# Altium PCB DMG_Control_PanelV2.PcbDoc (part 1 of 2)
Units mm, origin at the board's own origin, x right, y up, seen from the top; angles counter-clockwise.
Board outline 81.28 x 71.72 mm, 2 copper layers (Top, Bottom), stack 1.572 mm thick; 117 components, 107 nets, 413 pads, 81 vias.
Unrouted connection lines stored in the file: 2.
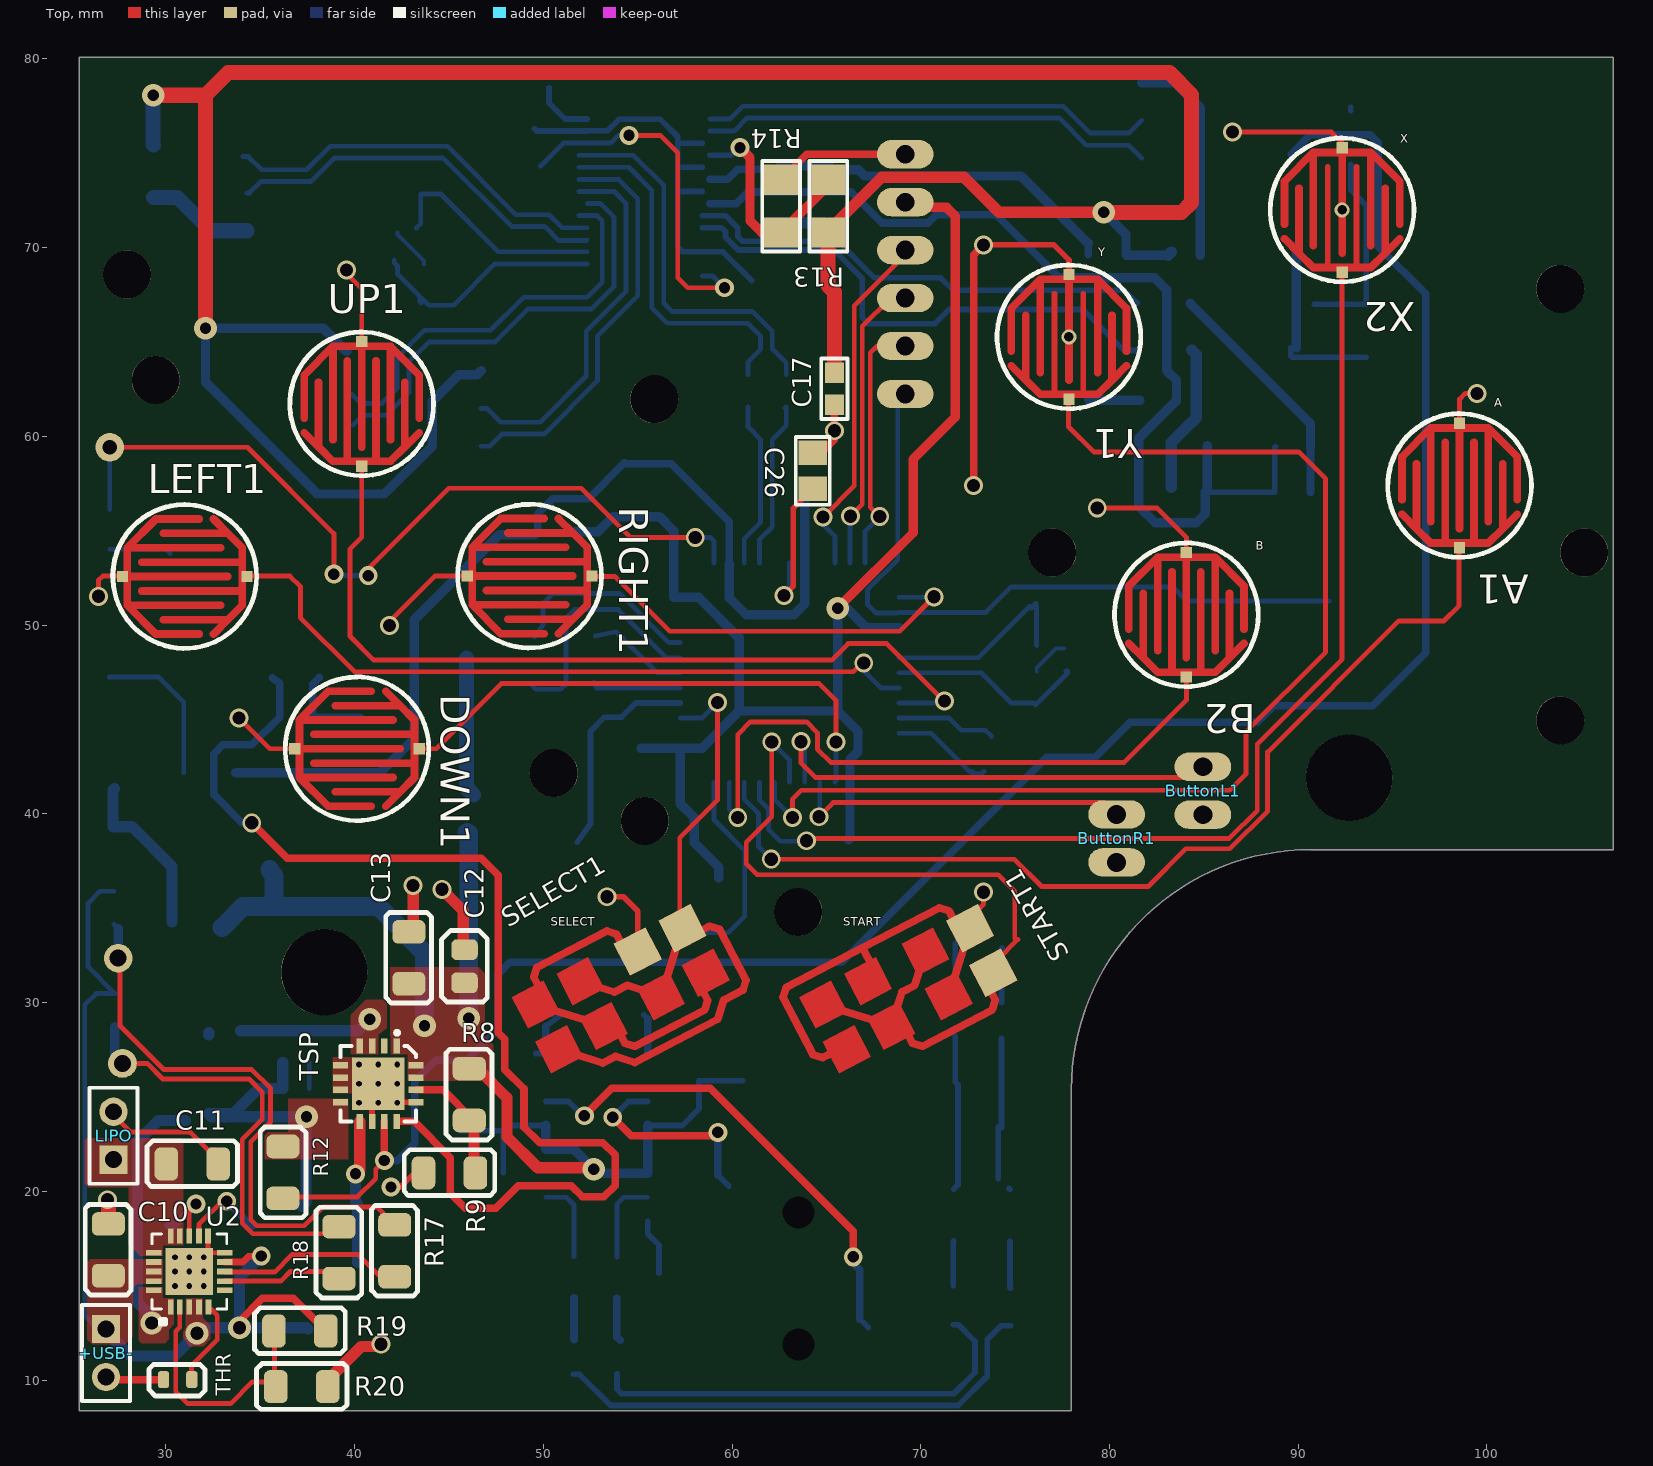
[diagram p0: Top view]
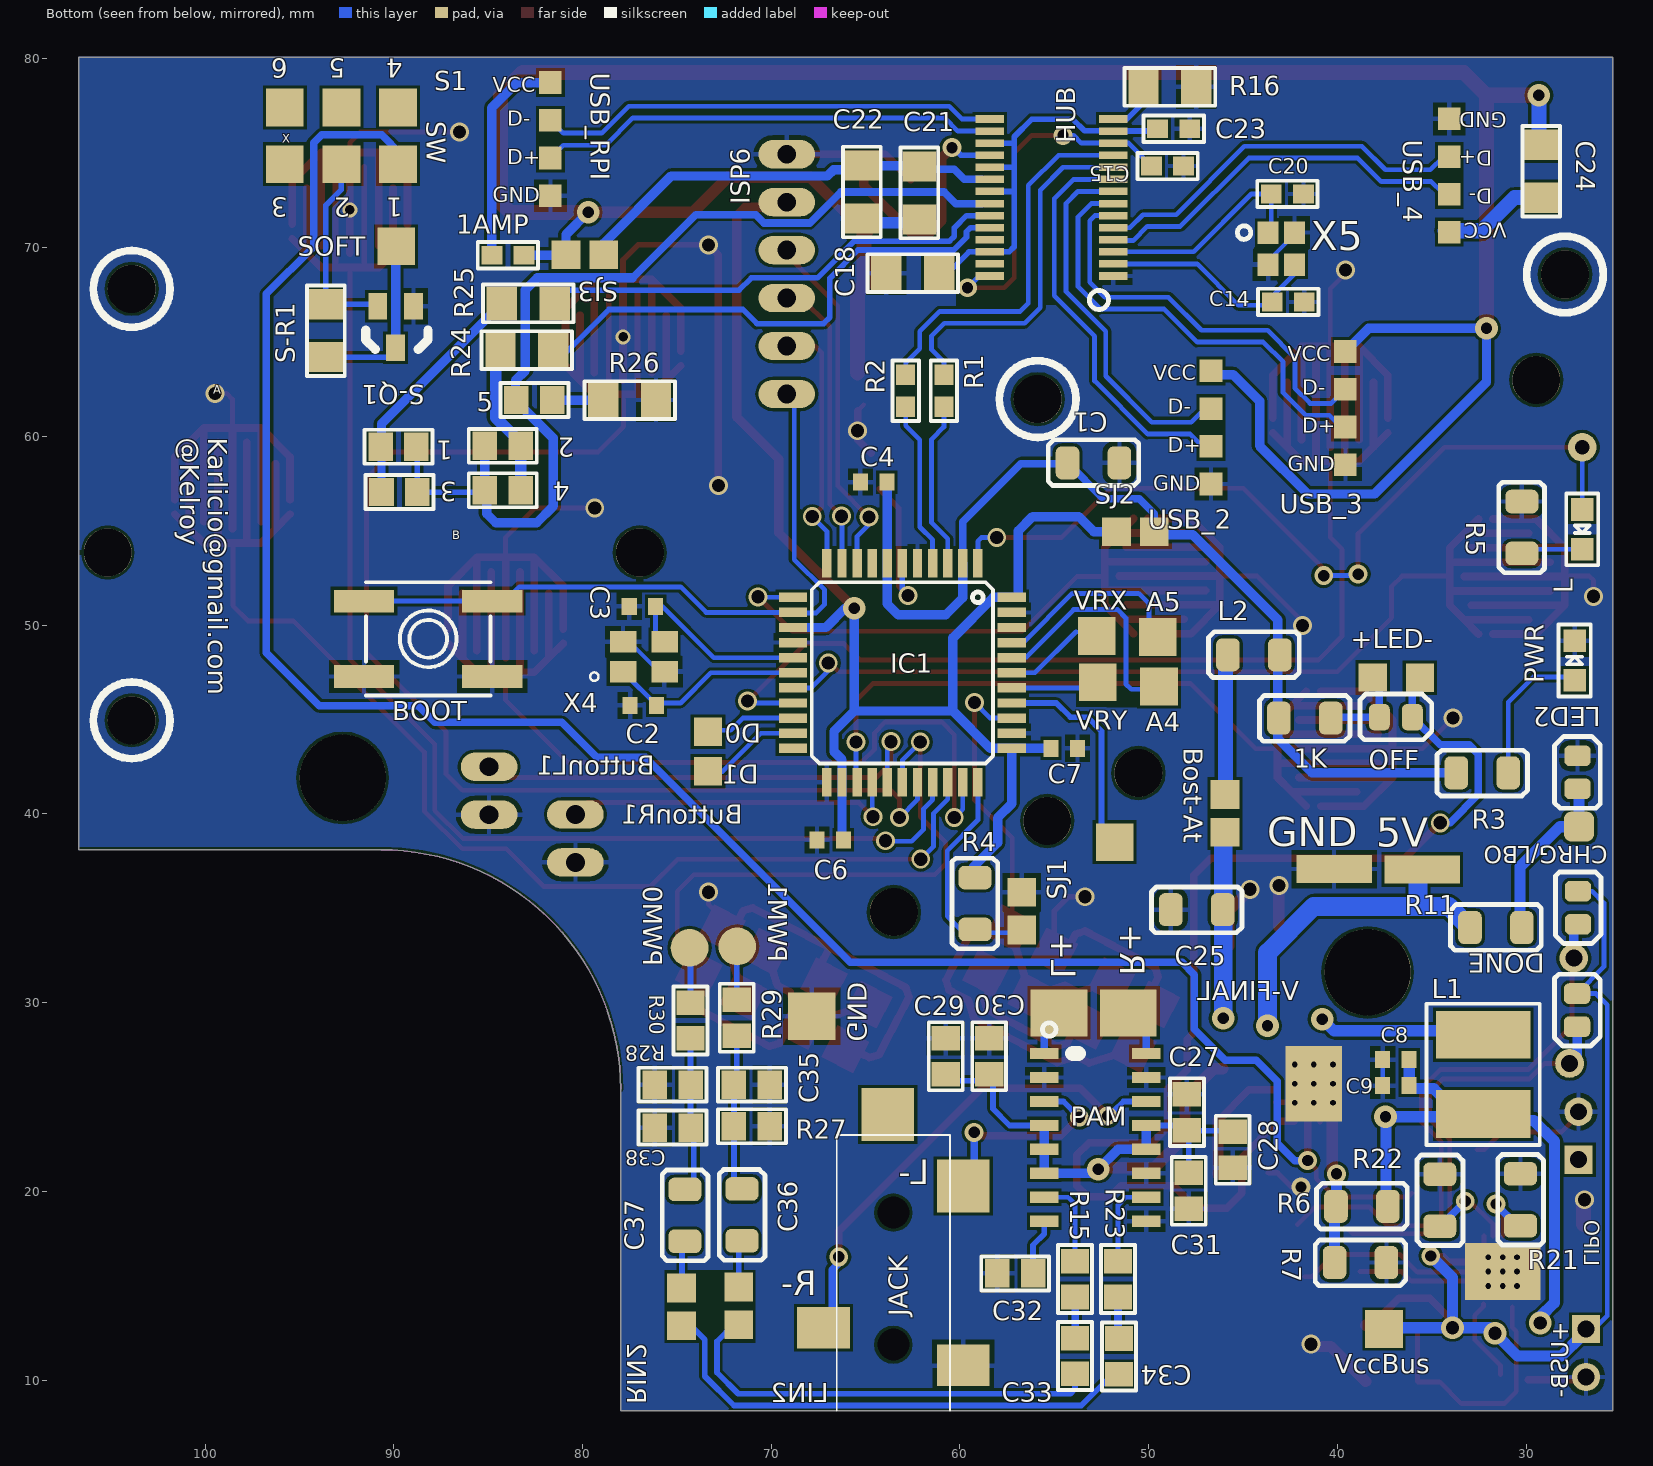
[diagram p1: Bottom view, seen from below]

## Layer stack, top to bottom
Top Solder: solder mask 0.0102, Solder Resist, Dk 3.5
Top: signal copper 0.0356
Dielectric 1: core 1.5011, FR-4, Dk 4.8
Bottom: signal copper 0.0356
Bottom Solder: solder mask 0.0102, Solder Resist, Dk 3.5

## Board outline
25.4,8.382 25.4,80.1 106.68,80.1 106.68,38.1 90.678,38.1 ccw(c90.678,25.4) 77.978,25.4 77.978,8.382

## Design rules (kind name [scope] priority, off if disabled: settings)
Clearance [All] p1: gap=0.152 except(0: SMDPad-SMDPad SMDPad-THPad SMDPad-Via)
Clearance "Clearance (Same Net)" [All] p2: gap=0 except(0.152: SMDPad-SMDPad SMDPad-THPad SMDPad-Via)
DiffPairsRouting DiffPair_FE1sDiffPairsRouting [InDifferentialPairClass('DIFF90')] p1: maxlimit=0.35 minlimit=0.254 mostfreqgap=0.3 toplayer_minwidth=0.2 toplayer_maxwidth=0.381 toplayer_prefwidth=0.254 bottomlayer_minwidth=0.2 bottomlayer_maxwidth=0.381 bottomlayer_prefwidth=0.254 maxuncoupledlength=12.7
DiffPairsRouting ATMEGADIFFDiffPairsRouting [InDifferentialPairClass('ATDIFF90')] p2: maxlimit=0.35 minlimit=0.254 mostfreqgap=0.3 toplayer_minwidth=0.2 toplayer_maxwidth=0.3 toplayer_prefwidth=0.254 bottomlayer_minwidth=0.2 bottomlayer_maxwidth=0.3 bottomlayer_prefwidth=0.254 maxuncoupledlength=12.7
DiffPairsRouting [All] p3: maxlimit=0.254 minlimit=0.254 mostfreqgap=0.254 toplayer_minwidth=0.381 toplayer_maxwidth=0.381 toplayer_prefwidth=0.381 bottomlayer_minwidth=0.381 bottomlayer_maxwidth=0.381 bottomlayer_prefwidth=0.381 maxuncoupledlength=12.7
HoleSize HoleSize_1 [All] p1: absolutevalues=TRUE maxlimit=2540 minlimit=0.33 maxpercent=80.000 minpercent=20.000
HoleSize [All] p2: absolutevalues=TRUE maxlimit=2.54 minlimit=0.025 maxpercent=80.000 minpercent=20.000
HoleToHoleClearance mdViaViaSameLayer [All] p1: gap=0.203 allowstackedmicrovias=TRUE
HoleToHoleClearance [All] p2: gap=0.254 allowstackedmicrovias=TRUE
MatchedLengths DiffPair_FE1sMatchedLengths [InDifferentialPairClass('DIFF90')] p1: tolerance=0.127 checknetsindiffpair=FALSE checkdiffpairvsdiffpair=TRUE checkxsignals=TRUE checkothers=TRUE
MatchedLengths ATMEGADIFFMatchedLengths [InDifferentialPairClass('ATDIFF90')] p2: tolerance=0.127 checknetsindiffpair=FALSE checkdiffpairvsdiffpair=TRUE checkxsignals=TRUE checkothers=TRUE
PasteMaskExpansion mlMinCreamFrame [All] p1: expansion=0
PasteMaskExpansion [All] p2: expansion=0
PlaneConnect PlaneConnect_1 [All] p1: planeconnectstyle=Relief reliefexpansion=0.508 reliefentries=4 reliefconductorwidth=0.254 reliefairgap=0.254
PolygonConnect PolygonConnect_10 [All vs IsNamedPolygon('5vAMP')] p1: connectstyle=Direct reliefconductorwidth=0.254 reliefentries=4 polygonreliefangle="90 Angle" airgapwidth=0.254
PolygonConnect PolygonConnect_9 [All vs IsNamedPolygon('GND PLANE')] p2: connectstyle=Relief reliefconductorwidth=0.254 reliefentries=4 polygonreliefangle="90 Angle" airgapwidth=0.254
PolygonConnect PolygonConnect_8 [All vs IsNamedPolygon('GND PLANE')] p3: connectstyle=Relief reliefconductorwidth=0.3 reliefentries=4 polygonreliefangle="90 Angle" airgapwidth=0.254
PolygonConnect PolygonConnect_7 [All vs IsNamedPolygon('GND PLANE')] p4: connectstyle=Relief reliefconductorwidth=0.35 reliefentries=4 polygonreliefangle="90 Angle" airgapwidth=0.254
PolygonConnect PolygonConnect_6 [All vs IsNamedPolygon('GNDTSP')] p5: connectstyle=Direct reliefconductorwidth=0.254 reliefentries=4 polygonreliefangle="90 Angle" airgapwidth=0.254
PolygonConnect PolygonConnect_5 [All vs IsNamedPolygon('VBAT TSP')] p6: connectstyle=Direct reliefconductorwidth=0.254 reliefentries=4 polygonreliefangle="90 Angle" airgapwidth=0.254
PolygonConnect PolygonConnect_4 [All vs IsNamedPolygon('AMP')] p7: connectstyle=Direct reliefconductorwidth=0.254 reliefentries=4 polygonreliefangle="90 Angle" airgapwidth=0.254
PolygonConnect PolygonConnect_3 [All vs IsNamedPolygon('MCP-VBus')] p8: connectstyle=Direct reliefconductorwidth=0.254 reliefentries=4 polygonreliefangle="90 Angle" airgapwidth=0.254
PolygonConnect PolygonConnect_2 [All vs IsNamedPolygon('MCP')] p9: connectstyle=Direct reliefconductorwidth=0.254 reliefentries=4 polygonreliefangle="90 Angle" airgapwidth=0.254
PolygonConnect PolygonConnect_1 [All vs IsNamedPolygon('TSP')] p10: connectstyle=Direct reliefconductorwidth=0.254 reliefentries=4 polygonreliefangle="90 Angle" airgapwidth=0.254
PolygonConnect ThermalVias [IsVia] p11: connectstyle=Direct reliefconductorwidth=0.254 reliefentries=4 polygonreliefangle="90 Angle" airgapwidth=0.254
PolygonConnect [All] p12: connectstyle=Relief reliefconductorwidth=0.254 reliefentries=4 polygonreliefangle="90 Angle" airgapwidth=0.254
RoutingVias [All] p1: holewidth=0.7 width=1 viastyle="Through Hole" minholewidth=0.6 minwidth=1 maxholewidth=0.8 maxwidth=1.27
SilkToSilkClearance [All] p1 off: silktosilkclearance=0.254
SilkToSolderMaskClearance [IsPad] p1 off: minsilkscreentomaskgap=0.254 clearancetoexposedcopper=TRUE
SolderMaskExpansion mlMinStopFrame [All] p1: expansion=0.102
SolderMaskExpansion [All] p2: expansion=0.102
Width Width_1 [All] p1: maxlimit=2540 minlimit=0.152 preferedwidth=0.254
Width [All] p2: maxlimit=0.254 minlimit=0.254 preferedwidth=0.254
23 further rules are at their usual default settings.

## Classes and differential pairs
differential pair class ATDIFF90: AT USB1
differential pair class DIFF90: OUTUSB USB2 USB3 USB4
net class DIFF90: AT_N AT_P OUTUSB_N OUTUSB_P USB1_N USB1_P USB2_N USB2_P USB3_N USB3_P USB4_N USB4_P
component class Audio_Actual: C27 C28 C29 C30 C31 C32 C33 C34 C35 C36 C37 C38 PAM R15 R23 R27 R28 R29 R30
component class Sheet2: 1 1AMP 2 3 4 5 C14 C15 C17 C18 C20 C21 C22 C23 C24 HUB R13 R14 R16 R24 R25 R26 S1 S-Q1 S-R1 SJ3 USB_2 USB_3 USB_4 USB_RPI X5
component class Sheet1: A1 B2 BOOT Bost-At ButtonL1 ButtonR1 C1 C2 C3 C4 C6 C7 C26 DOWN1 IC1 ISP6 L2 LEFT1 PWR R1 R2 R3 R4 R5 RIGHT1 SELECT1 SJ1 SJ2 START1 UP1 X2 X4 Y1
component class PowerBoost_kel: +USB- BateryIn C8 C9 C10 C11 C12 C13 C25 CHRG/LBO DONE L1 l-LOW LED2 LIPO OFF R6 R7 R8 R9 R11 R12 R17 R18 R19 R20 R21 R22 T1 THERM THR TSP U2 VBatIn X1
differential pair USB4: +USB4_P -USB4_N
differential pair USB3: +USB3_P -USB3_N
differential pair USB2: +USB2_P -USB2_N
differential pair USB1: +USB1_P -USB1_N
differential pair OUTUSB: +OUTUSB_P -OUTUSB_N
differential pair AT: +AT_P -AT_N

## Components (designator, comment, footprint, x,y, rotation, side; value= is the part's Value field where it differs from the comment)
1 "GREEN" 0805 89.75,59.45 r0 bottom
1AMP "Fuse 2" 0603 83.95,69.6 r180 bottom
1K "Comment" RES-1206in 40.35,45.075 r0 bottom
2 "GREEN" 0805 84.225,59.5 r180 bottom
3 "GREEN" 0805 89.7,57.05 r180 bottom
4 "GREEN" 0805 84.225,57.15 r0 bottom
5 "RED" 0805 82.55,61.925 r180 bottom
+USB- "Header 2" HDR1X2 26.825,12.7 r270 top (schematic designator VBatIn)
A1 "SW-PB" DMG-BTN 98.55,57.4 r180 top
B2 "SW-PB" DMG-BTN 84.075,50.55 r180 top
BOOT "EVQQ2" EVQ-Q2 88.175,49.275 r0 bottom
Bost-At "HWB" JUMPER 45.95,39.025 r90 bottom (schematic designator SJ3)
ButtonL1 "SW-PB" 1X02_OVAL 84.95,41.225 r90 top
ButtonR1 "SW-PB" 1X02_OVAL 80.375,38.7 r90 top
C1 "Cap Pol1" RES-1206in 54.3,58.6 r180 bottom
C2 "9pF" 1608[0603] 76.775,45.75 r180 bottom
C3 "9pF" 1608[0603] 76.825,51 r180 bottom
C4 "0.1uF" 1608[0603] 64.575,57.575 r0 bottom
C6 "0.1uF" 1608[0603] 66.875,38.625 r0 bottom
C7 "0.1uF" 1608[0603] 54.475,43.475 r180 bottom
C8 "10uF" 1608[0603] 36.9,26.975 r0 bottom
C9 "0.1uF" 1608[0603] 36.9,25.6 r0 bottom
C10 "10uF" RES-1206in 26.95,15.525 r90 top
C11 "10uF" RES-1206in 30.025,21.45 r0 top
C12 "2.2uF" RES-0805 45.825,31.05 r90 top
C13 "100uF" RES-1206in 42.875,31 r90 top
C14 "Cap" 0603 42.6,67.125 r180 bottom
C15 "Cap" 0603 49,74.325 r180 bottom
C17 "Cap" 0603 65.425,62.525 r90 top
C18 "Cap" 1206 62.5,68.65 r0 bottom
C20 "Cap" 0603 42.65,72.85 r0 bottom
C21 "Cap" 1206 62.15,72.9 r90 bottom
C22 "Cap" 1206 65.2,72.95 r90 bottom
C23 "Cap" 0603 48.675,76.3 r0 bottom
C24 "Cap" 1206 29.2,74.05 r90 bottom
C25 "Cap2" RES-1206in 46.075,34.925 r0 bottom
C26 "Cap" 0805 64.275,58.175 r270 top
C27 "Cap" 0805 47.975,24.192 r90 bottom
C28 "Cap" 0805 45.548,22.204 r90 bottom
C29 "Cap" 0805 60.752,27.154 r90 bottom
C30 "Cap" 0805 58.452,27.154 r270 bottom
C31 "Cap" 0805 47.875,20.025 r90 bottom
C32 "Cap" 0805 57.075,15.65 r0 bottom
C33 "Cap" 0805 53.9,11.275 r90 bottom
C34 "Cap" 0805 51.575,11.25 r90 bottom
C35 "Cap" 0805 71.025,25.65 r180 bottom
C36 "Cap" RES-1206in 71.55,20.125 r270 bottom
C37 "Cap" RES-1206in 74.575,20.1 r270 bottom
C38 "Cap" 0805 75.225,23.375 r180 bottom
CHRG/LBO "ORANGE" RES-0805 27.25,35.9 r270 bottom
DONE "GREEN" RES-0805 27.3,30.475 r270 bottom
DOWN1 "SW-PB" DMG-BTN 40.125,43.45 r270 top
HUB "Fe1.1s" fe1.1s 51.875,68.5 r90 bottom
IC1 "ATMEGA32U4-AU" TQFP44 63.05,47.475 r270 bottom
ISP6 "PINHD-2X3THM" 1X06_OVAL 69.175,68.6 r270 bottom
JACK "Comment" jack3.5 61.225,8.375 r90 bottom
L "RED" CHIPLED_0805 27.025,55.075 r0 bottom
L1 "6.8uH" INDUCTOR_5X5MM_TDK_VLC5045 32.275,26.2 r90 bottom
L2 "500mA" RES-1206in 45.8,48.425 r180 bottom
LED2 "BLUE" RES-0805 27.275,41.325 r90 bottom
LEFT1 "SW-PB" DMG-BTN 31,52.575 r270 top
LIPO "Header 2" HDR1X2 27.225,21.675 r90 top (schematic designator BateryIn)
OFF "RED" RES-0805 37.775,45.125 r180 bottom (schematic designator LED1)
PAM "Pam8403" "pam8403 Sop16" 55.525,27.3 r270 bottom
PWR "GREEN" CHIPLED_0805 27.425,48.125 r180 bottom
R1 "22" 0603 60.85,62.42 r270 bottom
R2 "22" 0603 62.875,62.42 r270 bottom
R3 "1K" RES-1206in 30.95,42.175 r0 bottom
R4 "10K" RES-1206in 59.2,33.875 r90 bottom
R5 "1K" RES-1206in 30.225,53.8 r90 bottom
R6 "1.87M" RES-1206in 40.075,19.2 r180 bottom
R7 "340K" RES-1206in 37.4,16.225 r0 bottom
R8 "1.87M" RES-1206in 46.075,23.75 r90 top
R9 "200K" RES-1206in 43.65,20.975 r0 top
R11 "1K" RES-1206in 32.975,33.975 r180 bottom
R12 "200K" RES-1206in 36.2,22.375 r270 top
R13 "Res1" 1206 65.1,72.2 r270 top
R14 "Res1" 1206 62.6,72.2 r270 top
R15 "Res2" 0805 53.9,15.35 r90 bottom
R16 "Res1" 1206 48.875,78.525 r0 bottom
R17 "1K" RES-1206in 42.125,15.475 r90 top
R18 "1K" RES-1206in 39.175,15.375 r90 top
R19 "270K" RES-1206in 35.725,12.6 r0 top
R20 "100K" RES-1206in 35.825,9.65 r0 top
R21 "1.0K" RES-1206in 30.3,20.925 r270 bottom
R22 "100K" RES-1206in 34.575,20.9 r270 bottom
R23 "Res2" 0805 51.625,15.35 r90 bottom
R24 "Res1" 1206 82.95,64.575 r0 bottom
R25 "Res1" 1206 82.875,67.05 r0 bottom
R26 "Res1" 1206 77.5,61.925 r0 bottom
R27 "Res2" 0805 71.025,23.45 r180 bottom
R28 "Res2" 0805 75.225,25.65 r180 bottom
R29 "Res2" 0805 71.827,29.198 r270 bottom
R30 "Res2" 0805 74.275,29.05 r270 bottom
RIGHT1 "SW-PB" DMG-BTN 49.275,52.6 r270 top
S1 "SW DPDT" Switch 89.775,74.425 r0 bottom
S-Q1 "JFET-P" "SOT-23 TO236" 88.95,66.9 r0 bottom
S-R1 "Res1" 1206 93.6,65.6 r270 bottom
SELECT1 "SW-PB" DMG-SEL 54.102,30.734 r27.5 top
SJ1 "HWB" JUMPER 56.725,33.85 r90 bottom
SJ2 "VCC" JUMPER 51.7,54.95 r180 bottom
SJ3 "HUB-HWB" JUMPER 78.875,69.625 r0 bottom
SJ3 "HWB" JUMPER 71.725,12.925 r90 bottom
SJ3 "HWB" JUMPER 74.75,12.875 r90 bottom
START1 "SW-PB" DMG-ST 69.342,30.734 r27.5 top
THR "15K" Res-0603 29.875,10.025 r0 top (schematic designator THERM)
TSP "TPS61090RSAR" QFN65P400X400X100-17N 41.25,25.7 r270 top (schematic designator U2)
U2 "MCP73871" QFN50P400X400X100-21N 31.242,15.748 r90 top
UP1 "SW-PB" DMG-BTN 40.375,61.725 r180 top
USB_2 "USB_4pin" USBPADS 46.7,63.475 r270 bottom
USB_3 "USB_4pin" USBPADS 39.575,64.5 r270 bottom
USB_4 "USB_4pin" USBPADS 34.075,70.825 r90 bottom
USB_RPI "USB_4pin" USBPADS 81.7,78.75 r270 bottom
X2 "SW-PB" "DMG-BTN -XY" 92.325,72 r180 top
X4 "SMD-CRYSTAL-16MHZ-9PF-Resonador" Resonador3.2x2.5 77.85,47.525 r180 bottom
X5 "SMD-CRYSTAL-16MHZ-9PF-Resonador" Res12MHZ-smd 43.675,70.8 r270 bottom
Y1 "SW-PB" "DMG-BTN -XY" 77.85,65.275 r180 top

## Footprints (in the part's own frame and the unit in brackets; to place one, negate y for a bottom-side part, rotate by r counter-clockwise, add the part's x,y. Pads: shape width x height; smd on the part's side, far side on the other; paste and mask are expansions set on the pad)
1X02_OVAL [mm]
  oval 1.5x3 hole 1: 1(-1.27,0) 2(1.27,0)
1X06_OVAL [mm]
  oval 1.5x3 hole 1: 1(-6.35,0) 2(-3.81,0) 3(-1.27,0) 4(1.27,0) 5(3.81,0) 6(6.35,0)
0603 [mm]
  rect 1.1x1 smd: 1(-0.85,0) 2(0.85,0)
  silkscreen extent -1.6,-0.7 1.6,0.7
0805 [mm]
  rect 1.3x1.5 smd: 1(-0.95,0) 2(0.95,0)
  silkscreen extent -1.8,-0.9 1.8,0.9
1206 [mm]
  rect 1.6x1.8 smd: 1(-1.4,0) 2(1.4,0)
  silkscreen extent -2.4,-1 2.4,1
1608[0603] [mm] "Chip Capacitor, Body 1.6x0.8mm, IPC High Density"
  rect 0.8x0.9 smd: 1(-0.7,0) 2(0.7,0)
  body extent -0.87,-0.48 0.87,0.48, height 1.3
CHIPLED_0805 [mm]
  rect 1.2x1.2 smd: A(0,-1.05) C(0,1.05)
  silkscreen extent -0.85,-1.9 0.85,1.9
DMG-BTN [mm]
  rect 0.6x0.6 smd: 1(0,-3.302) 2(0,3.302)
  Top lines w0.406: 3.048,1.524 2.286,2.286 ; 3.048,0.762 3.048,-1.524 1.524,-3.048 ; 2.286,-1.143 2.286,2.286 ; 1.524,1.905 1.524,-3.048 ; 0.762,-2.286 0.762,3.048 ; 0,2.286 0,-3.048 ; -0.762,-2.286 -0.762,3.048 ; -1.524,1.905 -1.524,-3.048 ; -2.286,-1.143 -2.286,2.286 ; -3.048,1.524 -2.286,2.286 ; -3.048,0.762 -3.048,-1.524 -1.524,-3.048 ; 2.286,2.286 1.524,3.048 0.762,3.048 ; 1.524,-3.048 0,-3.048 ; 0.762,3.048 -0.762,3.048 ; 0,-3.048 -1.524,-3.048 ; -0.762,3.048 -1.524,3.048 -2.286,2.286
  silkscreen extent -3.81,-3.81 3.81,3.81
"DMG-BTN -XY" [mm]
  rect 0.6x0.6 smd: 1(0,-3.302) 2(0,3.302)
  Top lines w0.3: 0.762,3.048 0.762,-2.286 ; -0.762,3.048 -0.762,-2.286
  Top lines w0.406: 3.048,1.524 2.286,2.286 ; 3.048,0.762 3.048,-1.524 1.524,-3.048 ; 2.286,-1.143 2.286,2.286 ; 1.524,1.905 1.524,-3.048 ; 0,2.286 0,-3.048 ; -1.524,1.905 -1.524,-3.048 ; -2.286,-1.143 -2.286,2.286 ; -3.048,1.524 -2.286,2.286 ; -3.048,0.762 -3.048,-1.524 -1.524,-3.048 ; 2.286,2.286 1.524,3.048 0.762,3.048 -0.762,3.048 -1.524,3.048 -2.286,2.286 ; 1.524,-3.048 0,-3.048 ; 0,-3.048 -1.524,-3.048
  Top (Mech8) keep-out circle w0: c0,0 r4.127
  silkscreen extent -3.81,-3.81 3.81,3.81
DMG-SEL [mil]
  rect 75x75 smd: 1(67.5,52.5) 2(172.5,52.5)
  Top region: 30,-90 105,-90 105,-15 30,-15
  Top region: 135,-90 210,-90 210,-15 135,-15
  Top region: 135,15 210,15 210,90 135,90
  Top region: 30,15 105,15 105,90 30,90
  Top region: -105,15 -30,15 -30,90 -105,90
  Top region: -105,-90 -30,-90 -30,-15 -105,-15
  Top region: -210,-90 -135,-90 -135,-15 -210,-15
  Top region: -210,15 -135,15 -135,90 -210,90
  Top lines w16: -150,75 -150,105 -135,120 30,120 45,105 45,75 ; -150,30 -90,-30 ; -150,-75 -105,-120 -75,-120 -45,-150 150,-150 180,-120 225,-120 240,-105 240,15 225,30 195,30 ; -45,30 -15,0 15,0 45,-30 ; -45,-75 -45,-105 -30,-120 135,-120 150,-105 150,-75 ; 90,-30 150,30
DMG-ST [mil]
  rect 75x75 smd: 1(172.5,52.5) 2(172.5,-52.5)
  Top region: -210,15 -135,15 -135,90 -210,90
  Top region: -210,-90 -135,-90 -135,-15 -210,-15
  Top region: -105,-90 -30,-90 -30,-15 -105,-15
  Top region: -105,15 -30,15 -30,90 -105,90
  Top region: 30,15 105,15 105,90 30,90
  Top region: 135,15 210,15 210,90 135,90
  Top region: 135,-90 210,-90 210,-15 135,-15
  Top region: 30,-90 105,-90 105,-15 30,-15
  Top lines w16: -210,-45 -225,-45 -240,-30 -240,105 -225,120 -45,120 ; -150,30 -90,-30 ; -45,75 -45,120 ; -45,-30 -15,0 15,0 45,30 ; -45,-75 -45,-105 -30,-120 135,-120 150,-105 150,-75 ; 90,-30 150,30 ; 150,75 150,105 135,120 -45,120
EVQ-Q2 [mm]
  rect 3.2x1.2 smd: A(-3.4,-2) A'(3.4,-2) B(-3.4,2) B'(3.4,2)
  silkscreen extent -3.3,-3 3.3,3
fe1.1s [mm]
  rect 0.4x1.5 smd: 1(0,0) 2(0.64,0) 3(1.28,0) 4(1.92,0) 5(2.56,0) 6(3.2,0) 7(3.84,0) 8(4.48,0) 9(5.12,0) 10(5.76,0) 11(6.4,0) 12(7.04,0) 13(7.68,0) 14(8.32,0) 15(8.32,6.55) 16(7.68,6.55) 17(7.04,6.55) 18(6.4,6.55) 19(5.76,6.55) 20(5.12,6.55) 21(4.48,6.55) 22(3.84,6.55) 23(3.2,6.55) 24(2.56,6.55) 25(1.92,6.55) 26(1.28,6.55) 27(0.64,6.55) 28(0,6.55)
  silkscreen extent -1.78,0.26 -0.76,1.27
HDR1X2 [mm] "Connector; Header; 2 Position"
  rect 1.5x1.5 hole 0.9: 1(0,0)
  round 1.5 hole 0.9: 2(2.54,0)
  silkscreen extent -1.27,-1.27 3.81,1.27
INDUCTOR_5X5MM_TDK_VLC5045 [mm]
  rect 2.54x5 smd: 1(-2.096,0) 2(2.096,0)
  silkscreen extent -3.74,-3 3.74,3
jack3.5 [mm]
  rect 2.2x2.8 smd: 1(2.4,-1.4) 3(4.4,6)
  rect 2.8x2.8 smd: 2(11.9,-1.4) 4(15.7,2.6)
  round 1 hole 1.7: 5(3.5,2.3)
  rect 1x1 hole 1.7: 6(10.5,2.3)
  silkscreen extent 0,-0.7 14.6,5.3
JUMPER [mil]
  rect 60x60 smd: 1(0,0) 2(78.74,0)
"pam8403 Sop16" [mm]
  rect 0.6x1.5 smd: 1(0,0) 2(1.27,0) 3(2.54,0) 4(3.81,0) 5(5.08,0) 6(6.35,0) 7(7.62,0) 8(8.89,0) 9(8.89,5.4) 10(7.62,5.4) 11(6.35,5.4) 12(5.08,5.4) 13(3.81,5.4) 14(2.54,5.4) 15(1.27,5.4) 16(0,5.4)
  silkscreen extent -1.63,-0.11 -0.91,0.61
QFN50P400X400X100-21N [mm]
  rect 0.813x0.305 smd: 1(-1.88,0.991) 2(-1.88,0.508) 3(-1.88,0) 4(-1.88,-0.508) 5(-1.88,-1.016) 11(1.88,-0.991) 12(1.88,-0.508) 13(1.88,0) 14(1.88,0.508) 15(1.88,0.991)
  rect 0.305x0.813 smd: 6(-0.991,-1.88) 7(-0.508,-1.88) 8(0,-1.88) 9(0.508,-1.88) 10(0.99,-1.88) 16(0.991,1.88) 17(0.508,1.88) 18(0,1.88) 19(-0.508,1.88) 20(-0.991,1.88)
  rect 2.5x2.5 smd: 21(0,0)
  silkscreen extent -2.79,-1.98 1.98,1.98
QFN65P400X400X100-17N [mm]
  rect 0.8x0.35 smd: 1(-2,0.975) 2(-2,0.325) 3(-2,-0.325) 4(-2,-0.975) 9(2,-0.975) 10(2,-0.325) 11(2,0.325) 12(2,0.975)
  rect 0.35x0.8 smd: 5(-0.975,-2) 6(-0.325,-2) 7(0.325,-2) 8(0.975,-2) 13(0.975,2) 14(0.325,2) 15(-0.325,2) 16(-0.975,2)
  rect 2.8x2.8 smd: 17(0,0)
  silkscreen extent -2.84,-2 2,2
Res12MHZ-smd [mm]
  rect 1.2x1.1 smd: 1(0,0) 2(1.7,0) 3(1.7,1.4) 4(0,1.4)
  silkscreen extent -0.36,-1.63 0.36,-0.91
Res-0603 [mm]
  rrect50% 0.6x0.9 smd: 1(0,0) 2(1.5,0)
  silkscreen extent -0.77,-0.87 2.2,0.8
RES-0805 [mm]
  rrect50% 1.1x1.4 smd: 1(0,0) 2(1.75,0)
  silkscreen extent -1.02,-1.2 2.78,1.22
RES-1206in [mm]
  rrect50% 1.25x1.75 smd: 1(0,0) 2(2.75,0)
  silkscreen extent -1.02,-1.2 3.77,1.22
Resonador3.2x2.5 [mm]
  rect 1.4x1.15 smd: 1(0,0) 2(2.2,0) 3(2.2,1.6) 4(0,1.6)
  silkscreen extent -1.75,-0.48 -1.3,-0.03
"SOT-23 TO236" [mm]
  rect 1x1.4 smd: 1(0,0) 2(1.9,0) 3(0.95,2.2)
  silkscreen extent -0.76,1.27 2.54,2.29
Switch [mm]
  rect 2x2 smd: 1(0,0) 2(3,0) 3(6,0) 4(0,-3) 5(3,-3) 6(6,-3)
TQFP44 [mm]
  rect 1.5x0.5 smd: 1(-5.8,4) 2(-5.8,3.2) 3(-5.8,2.4) 4(-5.8,1.6) 5(-5.8,0.8) 6(-5.8,0) 7(-5.8,-0.8) 8(-5.8,-1.6) 9(-5.8,-2.4) 10(-5.8,-3.2) 11(-5.8,-4) 23(5.8,-4) 24(5.8,-3.2) 25(5.8,-2.4) 26(5.8,-1.6) 27(5.8,-0.8) 28(5.8,0) 29(5.8,0.8) 30(5.8,1.6) 31(5.8,2.4) 32(5.8,3.2) 33(5.8,4)
  rect 0.5x1.5 smd: 12(-4,-5.8) 13(-3.2,-5.8) 14(-2.4,-5.8) 15(-1.6,-5.8) 16(-0.8,-5.8) 17(0,-5.8) 18(0.8,-5.8) 19(1.6,-5.8) 20(2.4,-5.8) 21(3.2,-5.8) 22(4,-5.8) 34(4,5.8) 35(3.2,5.8) 36(2.4,5.8) 37(1.6,5.8) 38(0.8,5.8) 39(0,5.8) 40(-0.8,5.8) 41(-1.6,5.8) 42(-2.4,5.8) 43(-3.2,5.8) 44(-4,5.8)
  silkscreen extent -4.8,-4.8 4.8,4.8
USBPADS [mm]
  rect 1.2x1.2 smd: 1(0,0) 2(2,0) 3(4,0) 4(6,0)

## Part data
1 2 3 4 5: library part LED3, "Typical BLUE SiC LED"
1AMP: "Fuse"
+USB- LIPO: "Header, 2-Pin"
A1 B2 ButtonL1 ButtonR1 DOWN1 LEFT1 RIGHT1 S1 SELECT1 START1 UP1 X2 Y1: "Switch"
Bost-At SJ1 SJ2 SJ3 SJ3 SJ3: library part SJ, "SMD solder JUMPER"
C1: "Polarized Capacitor (Radial)"
C2 C3 C4 C6 C7: library part C-USC0805K, "CAPACITOR, American symbol"
C8 C10 C11 C12: library part CAP_CERAMIC0805-NOOUTLINE, "Ceramic Capacitors   For new designs, use the packages preceded by an '_' character since they are more reliable:   The following footprints should be used on most boards: _0402 - Standard footprint for regular board layouts  _0603 - Standard footprint for regular board layouts  _0805 - Standard footprint for regular board layouts  _1206 - Standard footprint for regular board layouts       For extremely tight-pitch boards where space is at a premium, the following 'micro-pitch' footprints can be used (smaller pads, no silkscreen outline, etc.): _0402MP - Micro-pitch footprint for very dense/compact boards  _0603MP - Micro-pitch footprint for very dense/compact boards  _0805MP - Micro-pitch footprint for very dense/compact boards  _1206MP - Micro-pitch footprint for very dense/compact boards"
C9: library part CAP_CERAMIC0805_10MGAP, "Ceramic Capacitors   For new designs, use the packages preceded by an '_' character since they are more reliable:   The following footprints should be used on most boards: _0402 - Standard footprint for regular board layouts  _0603 - Standard footprint for regular board layouts  _0805 - Standard footprint for regular board layouts  _1206 - Standard footprint for regular board layouts       For extremely tight-pitch boards where space is at a premium, the following 'micro-pitch' footprints can be used (smaller pads, no silkscreen outline, etc.): _0402MP - Micro-pitch footprint for very dense/compact boards  _0603MP - Micro-pitch footprint for very dense/compact boards  _0805MP - Micro-pitch footprint for very dense/compact boards  _1206MP - Micro-pitch footprint for very dense/compact boards"
C13: library part C-USC1210, "CAPACITOR, American symbol"
C14 C15 C17 C18 C20 C21 C22 C23 C24 C25 C26 C27 C28 C29 C30 C31 C32 C33 C34 C35 C36 C37 C38: "Capacitor"
CHRG/LBO DONE LED2 OFF: library part LED0805_NOOUTLINE, "LED0603 - 0603 Surface Mount Package    2mA: Green LED - Low Power (3.9mcd, 2ma, 1.7Vf) - Digikey: 475-2709-2-ND  Orange LED - Low Power (9.8mcd, 2ma, 1.8Vf) - Digikey: 475-1194-2-ND  Red LED - Low Power (5mcd, 2ma, 1.8Vf) - Digikey: 475-1195-2-ND  Yellow LED - Low Power (7mcd, 2ma, 1.8Vf) - Digikey: 475-1196-2-ND       5mA: Blue LED - Low Power (17mcd, 5ma, 2.9Vf) - Digikey: LNJ937W8CRACT-ND    0805 - 0805 Surface Mount Package    2mA: Red LED (8.8mcd, 2mA, 1.8Vf, Clear) - Low Power [Digikey: 475-2510-1-ND]  Green LED (5mcd, 2mA, 1.8Vf, Clear) - Low Power [Digikey: 475-2730-1-ND]  Yellow LED (11.3mcd, 2mA, 1.8Vf, Clear) - Low Power [Digikey: 475-2555-1-ND]       20mA: Red LED (104mcd, 20mA, Diffused) - LS R976 [Digikey: 475-1278-6-ND]  Red LED (12mcd, 20mA, 2.0Vf, Clear) - APT2012EC [Digikey: 754-1128-1-ND]  Green LED (15mcd, 20mA, 2.2Vf, Clear) - APT2012GC [Digikey: 754-1131-1-ND]  Orange LED (160mcd, 20mA, 2.1Vf, Clear) - APT2012SECK [Digikey: 754-1130-1-ND]     1206 - 1206 Surface Mount Package  Green LED (26mcd, 20mA, Diffused) - LG N971  [Digikey: 475-1407-6-ND]  Red LED (15mcd, 20mA, Diffused) - LH N974 [Digikey: 475-1416-6-ND]     Cree - Cree High-Power Surface Mount LEDs  XPEBWT-L1-0000-00D50 - White 111lm 350mA 2.9Vf 6200K 110°  XTEAWT-00-0000-00000LEE3 - White 114lm 350mA 2.85Vf 5000K 115°     Everlight - Everlight 45-21 Series Surface Mount LEDs  45-21/QK2C-B2832AC2CB2/2T - Warm White 2000mcd 20mA 3.25Vf 3050K 120°  45-21/LK2C-B38452C4CB2/2T - Nuetral White 2000mcd 20mA 3.25Vf 4150K 120°  45-21/LK2C-B50634C6CB2/2T - Cold White 2200mcd 20mA 3.25Vf 5650K 120°     PLCC2 Reverse Mount LS T77K-J1L2-1-0-2-R18-Z - Red 11.25mcd 2mA 1.8Vf 630nm 120°  LO T77K-L1M2-24-Z - Orange 19.6mcd 2mA 1.8Vf 606nm 120°  LY T77K-K2M1-26-Z - Yellow 15.7mcd 2mA 1.8Vf 587nm 120°"
L PWR: library part LEDCHIPLED_0805, "LED   OSRAM: - CHIPLED LG R971, LG N971, LY N971, LG Q971, LY Q971, LO R971, LY R971 LH N974, LH R974 LS Q976, LO Q976, LY Q976 LO Q996 - Hyper CHIPLED LW Q18S LB Q993, LB Q99A, LB R99A - SideLED LS A670, LO A670, LY A670, LG A670, LP A670 LB A673, LV A673, LT A673, LW A673 LH A674 LY A675 LS A676, LA A676, LO A676, LY A676, LW A676 LS A679, LY A679, LG A679 -  Hyper Micro SIDELED® LS Y876, LA Y876, LO Y876, LY Y876 LT Y87S - SmartLED LW L88C, LW L88S LB L89C, LB L89S, LG L890 LS L89K, LO L89K, LY L89K LS L896, LA L896, LO L896, LY L896 - TOPLED LS T670, LO T670, LY T670, LG T670, LP T670 LSG T670, LSP T670, LSY T670, LOP T670, LYG T670 LG T671, LOG T671, LSG T671 LB T673, LV T673, LT T673, LW T673 LH T674 LS T676, LA T676, LO T676, LY T676, LB T676, LH T676, LSB T676, LW T676 LB T67C, LV T67C, LT T67C, LS T67K, LO T67K, LY T67K, LW E67C LS E67B, LA E67B, LO E67B, LY E67B, LB E67C, LV E67C, LT E67C LW T67C LS T679, LY T679, LG T679 LS T770, LO T770, LY T770, LG T770, LP T770 LB T773, LV T773, LT T773, LW T773 LH T774 LS E675, LA E675, LY E675, LS T675 LS T776, LA T776, LO T776, LY T776, LB T776 LHGB T686 LT T68C, LB T68C - Hyper Mini TOPLED® LB M676 - Mini TOPLED Santana® LG M470 LS M47K, LO M47K, LY M47K    Source: http://www.osram.convergy.de/"
L1: library part INDUCTORTDK_VLC5045, "Inductors   0603: 10nH Ceramic Inductor - microwire antenna/RF (Digikey: 712-1434-2-ND)       0805: 560nH Ceramic Inductor - RF (Digikey: 553-1047-1-ND)  270nH Ceramic Inductor - Q = 40@250MHz, +-5%, 1 Ohm DC Resistance (Digikey: 535-10506-2-ND)       1007 (2518 Metric) SMT: 10µH 10% 250mOhm 820mA 1007 Inductor (Digikey: 587-2189-1-ND)  22µH 10% 500mOhm 580mA 1007 Inductor (Digikey: 587-2190-1-ND)  47µH 10% 950mOhm 420mA 1007 Inductor (Digikey: 587-2191-1-ND)  47µH 5% 100mOhm 1A 1008 Inductor (Digikey: 732-1816-1-ND)       5.0x5.0mm (Taiyo Yuden NR5040 Series) 6.8µH 20% 2.3A 64mOhm Inductor (Digikey: 587-2374-2-ND)       5.0x5.0mm (TDK VLC5045 Series) 4.7µH 20% 3.3A 34mOhm Inductor (Digikey: 445-6526-1-ND)  6.8µH 20% 2.7A 46mOhm Inductor (Digikey: 445-6527-1-ND)       6.0x6.0mm (TDK VLC6045 Series) 4.7µH 20% 3.8A 27mOhm Inductor (Digikey: 445-6538-2-ND)  6.8µH 20% 3A 41mOhm Inductor (Digikey: 445-6540-1-ND)  6.2µH 30% 2.2A 45mOhm Inductor (Digikey: SRR5028-6R2YCT-ND) - Not TDK VLC6045 but footprint should match       6.0x6.0mm (TDK SLF6045 Series) 6.8uH 30% 2A 33mOhm Inductor (Digikey: 445-4572-1-ND, Mouser: 810-SLF645T6R8N2R0PF)       6.0x6.0mm (Sumida CDRH5D28 Series) 6.2uH 30% 1.8A 45mOhm Inductor (Digikey: 308-1542-1-ND)       Taiyo Yuden NR3015T2R2M - 2.2uH 20% 1.5A (Digikey: 587-1648-2-ND, Mouser: 963-NR3015T2R2M) - Used with TI TPS62172   CoilCraft RFID Transponder Coil - MA5532-AE (For use with AS3935 Lightning Sensor)   Vishay IHLP  1.0uH Molded Inductor - 24mOhm DCR, 5A, +/-20%, -55°C-125°C (Digikey: 541-1319-1-ND)"
L2: library part PTCFUSE-1206, "PTC fuses, resettable thermistors"
R1 R2 R3 R4 R5: library part R-US_R0805, "RESISTOR, American symbol"
R6 R7: library part RESISTOR_0805MP, "Resistors   For new designs, use the packages preceded by an '_' character since they are more reliable:   The following footprints should be used on most boards: _0402 - Standard footprint for regular board layouts  _0603 - Standard footprint for regular board layouts  _0805 - Standard footprint for regular board layouts  _1206 - Standard footprint for regular board layouts       For extremely tight-pitch boards where space is at a premium, the following 'micro-pitch' footprints can be used (smaller pads, no silkscreen outline, etc.): _0402MP - Micro-pitch footprint for very dense/compact boards  _0603MP - Micro-pitch footprint for very dense/compact boards  _0805MP - Micro-pitch footprint for very dense/compact boards  _1206MP - Micro-pitch footprint for very dense/compact boards"
R8 R9 R11 R12 R17 R18 R19 R20 R21 R22 THR: library part RESISTOR0805_NOOUTLINE, "Resistors   For new designs, use the packages preceded by an '_' character since they are more reliable:   The following footprints should be used on most boards: _0402 - Standard footprint for regular board layouts  _0603 - Standard footprint for regular board layouts  _0805 - Standard footprint for regular board layouts  _1206 - Standard footprint for regular board layouts       For extremely tight-pitch boards where space is at a premium, the following 'micro-pitch' footprints can be used (smaller pads, no silkscreen outline, etc.): _0402MP - Micro-pitch footprint for very dense/compact boards  _0603MP - Micro-pitch footprint for very dense/compact boards  _0805MP - Micro-pitch footprint for very dense/compact boards  _1206MP - Micro-pitch footprint for very dense/compact boards"
R13 R14 R15 R16 R23 R24 R25 R26 R27 R28 R29 R30 S-R1: "Resistor"
S-Q1: "P-Channel JFET"
TSP: library part VREG_TPS6103X, "TPS6103x 4A Boost - 1.8-5.5V Input, Adjustable Output to 5.5V"
U2: "MCP73871 Lithium Polymer Battery Charger   Digikey: MCP73871-2CCI/ML-ND"
X4 X5: library part SMD-CRYSTAL-16MHZ-9PF-10PPM-60R(4P-3.2X2.5MM), "SMD Crystal 16MHz-9pF-10ppm-60R;"

## Free pads (board coordinates)
  round 2.54 hole 2.54: 1(27.94,68.58) 1(29.464,62.992) 1(50.546,42.164) 1(55.372,39.624) 1(55.88,61.976) 1(63.5,34.798) 1(76.962,53.848) 1(103.886,44.958) 1(103.886,67.818) 1(105.156,53.848)
  round 4.572 hole 4.572: 1(38.4,31.6) 1(92.71,41.91)
  round 1.524 hole 0.762: 2(27.025,59.425)
  rrect50% 1.6x1.6 smd far side: 2(27.2,39.325)
  round 1.524 hole 0.9: 2(27.7,26.775) 3(27.475,32.35)
  rect 1.5x1.5 smd far side: 4(35.625,47.205) 4(38.125,47.225) 9(73.35,42.25) 10(73.35,44.35)
  rect 2x2 smd far side: 4(37.525,12.7) 4(49.45,46.75) 4(49.525,49.375) 4(51.8,38.5) 4(52.693,46.975) 4(52.75,49.425) 21(89.875,70.075)
  rect 4x1.5 smd far side: 7(35.5,37.05) 8(40.175,37.075)
  round 2 smd far side: 15(71.8,32.975) 15(74.325,32.9)
  rect 3x2.5 smd far side: 16(51.075,29.45) 19(54.75,29.45)
  rect 4x3 smd far side: 20(31.242,15.748)
  rect 3x4 smd far side: 20(41.25,25.7)
  rect 2.5x2.5 smd far side: 21(67.85,29.275)

## Via types
v1: diameter 1, hole 0.7, Top to Bottom, 34 vias
v2: diameter 0.5, hole 0.3, Top to Bottom, 18 vias
v3: diameter 1, hole 0.6, Top to Bottom, 15 vias
v4: diameter 1.2, hole 0.6, Top to Bottom, 9 vias
v5: diameter 1.2, hole 0.7, Top to Bottom, 3 vias
v6: diameter 0.8, hole 0.5, Top to Bottom, 2 vias

## Nets (pads, with @x,y where several pads share a name; then routed paths per layer and width w, separated by ;. In a path a pad name is that pad's centre, name@x,y a point inside that pad or via, vN(x,y) a via of type N, cw(c..) or ccw(c..) an arc to the next point about the centre after c; other vN are vias at no path point)
3.3V: S1.5 | length 0.2
  Bottom w0.3: S1.5@92.775,77.25 S1.5@92.775,77.425
+5V: 1K.2 C1.1 C4.1 IC1.2 IC1.7 L2.2 R3.2 SJ2.2 | length 53.2
  Bottom w0.4: SJ2.2@49.7,54.95 49.7,55.9 50.5,56.7 52.4,56.7 C1.1@54.3,58.6 ; C1.1@54.3,58.55 56.775,58.55 59.85,55.475 IC1.2@59.85,53.275
  Bottom w0.5: R3.2@33.7,42.175 41.35,42.175 43.15,43.975 43.15,50.275 47.67,54.795 49.545,54.795 SJ2.2@49.7,54.95 ; IC1.2@59.85,53.275 59.85,51.45 60.75,50.55 63.275,50.55 63.85,51.125 IC1.7@63.85,53.275 C4.1@63.85,57.2
A: A1.2 IC1.31 | length 52.8
  Top w0.254: v1(62.075,37.6) 74.95,37.6 76.4,36.15 82.05,36.15 84.05,38.15 86.375,38.15 88.375,40.15 88.375,43.275 95.325,50.225 97.725,50.225 98.525,51.025 A1.2@98.525,54.098
  Bottom w0.254: IC1.31@60.65,41.675 60.65,40.775 61.4,40.025 61.4,38.275 v1(62.075,37.6)
A4: IC1.40 pad.4@49.45,46.75 | length 12.7
  Bottom w0.254: pad.4@49.45,46.75 49.6,46.6 50.925,46.6 51.2,46.875 51.2,50.375 51.65,50.825 53.975,50.825 56.525,48.275 IC1.40@57.25,48.275
A5: IC1.41 pad.4@49.525,49.375 | length 10.5
  Bottom w0.254: pad.4@49.525,49.375 49.975,50 49.975,51.125 50.53,51.68 54.05,51.68 56.655,49.075 IC1.41@57.25,49.075
AT_N: IC1.3 R1.2 | length 8.9
  Bottom w0.254: IC1.3@60.65,53.275 60.65,54.57 61.5,55.421 61.5,59.85 60.85,60.5 R1.2@60.85,61.571
AT_P: IC1.4 R2.2 | length 9
  Bottom w0.254: IC1.4@61.45,53.275 61.45,54.525 62.125,55.2 62.125,59.825 62.875,60.575 R2.2@62.875,61.571 R2.2@62.8,61.496
B: B2.2 IC1.32 | length 34.8
  Top w0.254: v1(60.3,39.8) 60.3,44.2 60.975,44.875 63.95,44.875 64.525,44.3 64.525,43.425 65.225,42.725 80.775,42.725 84.075,46.025 B2.2@84.075,47.502
  Bottom w0.254: IC1.32@59.85,41.675 59.85,40.25 v1(60.3,39.8)
BUTTONL: ButtonL1.2 IC1.27 | length 25.2
  Top w0.254: v1(63.65,43.825) 63.65,42.7 64.425,41.925 84.38,41.925 ButtonL1.2@84.95,42.495
  Bottom w0.254: v1(63.65,43.825) 63.85,43.625 IC1.27@63.85,41.675
BUTTONR: ButtonR1.2 IC1.26 | length 18.2
  Top w0.254: v1(64.6,39.85) 65.35,40.6 79.745,40.6 ButtonR1.2@80.375,39.97
  Bottom w0.254: v1(64.6,39.85) 64.65,39.9 IC1.26@64.65,41.675
D0/RX: IC1.20 pad.10 | length 5.3
  Bottom w0.254: IC1.20@68.85,45.075 71.5,45.075 72.15,44.425 73.425,44.425 pad.10@73.75,44.1
D1/TX: IC1.21 pad.9 | length 5.5
  Bottom w0.254: IC1.21@68.85,44.275 70.55,44.275 72.575,42.25 72.75,42.25 72.75,42.119 73.219,42.119 pad.9@73.35,42.25